# Allegro board s08-2.brd
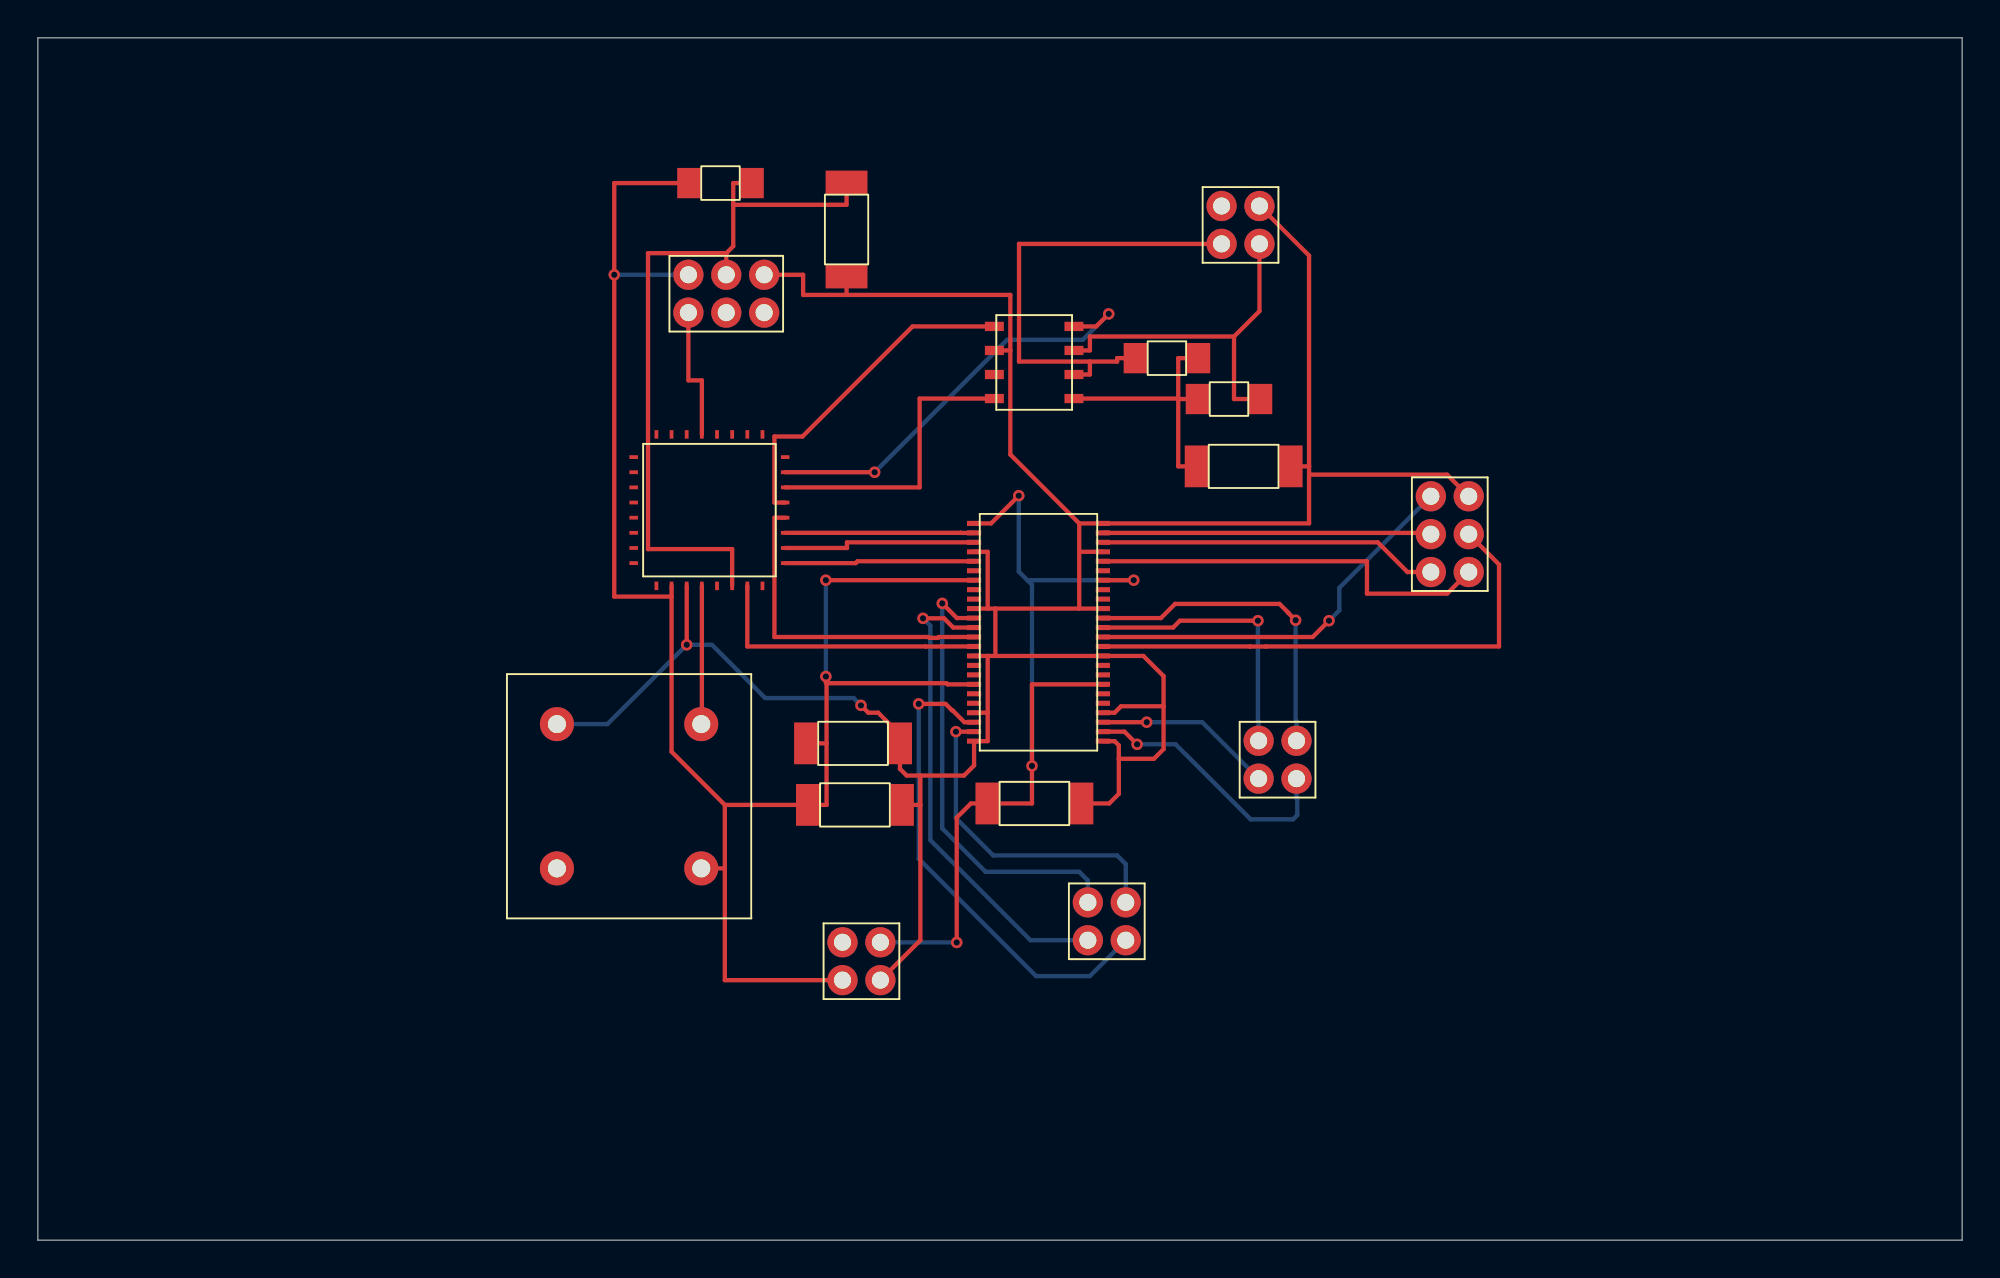
[diagram p0: board, top side]
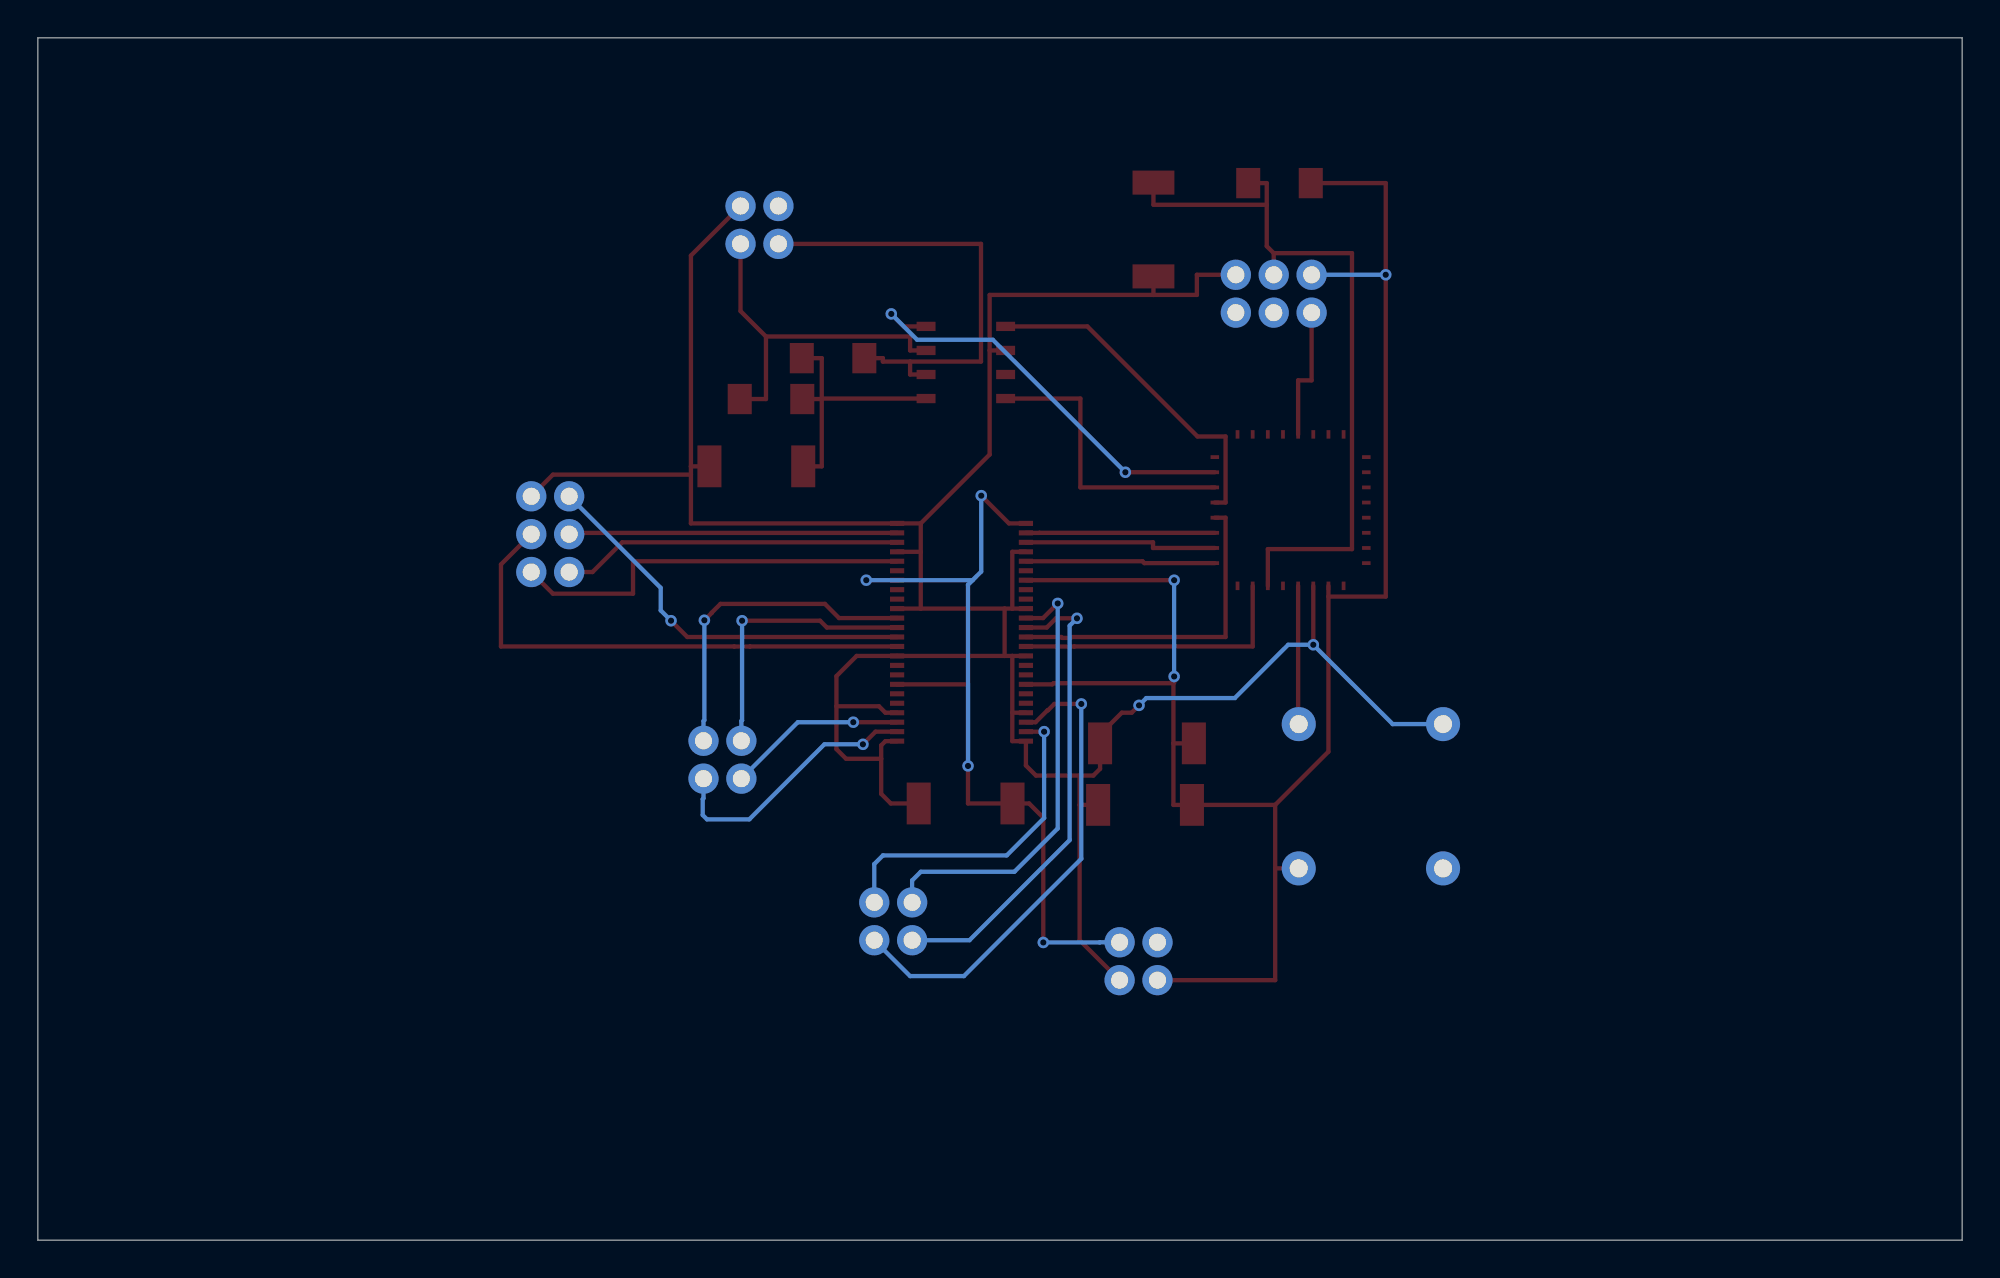
[diagram p1: board, bottom side, seen from below]

Outline 101.6 x 63.5 mm; copper layers: TOP, BOTTOM. Coordinates in mm from the lower left corner of the outline.
Outline path: 0,63.5 101.6,63.5 101.6,0 0,0 0,63.5

## Placement (name value [footprint] x y rotation side)
C9  0.1u  [SMDCAP]  43.1 26.24 0 top
C10  0.1u  [SMDCAP]  52.68 23.06 0 top
C11  0.1u  [SMDCAP]  63.6 40.87 180 top
C12  0.1u  [SMDCAP]  42.7 53.44 90 top
C13  10u  [SMDCAP]  43.21 22.99 0 top
J7  Background Header  [HEADER6]  36.35 49.99 90 top
J12  CON6  [HEADER6]  74.55 37.29 0 top
J14  CON4  [HEADER4]  43.48 14.73 270 top
J15  CON4  [HEADER4]  63.5 53.62 90 top
J16  CON4  [HEADER4]  65.46 25.37 270 top
J17  CON4  [HEADER4]  56.44 16.84 0 top
R3  60  [SMDRES]  62.89 44.42 0 top
R4  60  [SMDRES]  59.61 46.58 0 top
R5  10k  [SMDRES]  36.04 55.83 180 top
U1  MC9S08DZ60  [MC9S08_LQFP32]  35.46 38.56 90 top
U2  SN74LVC16T245  [SN74_DGG]  52.83 32.11 0 top
U3  TJA1040T  [TJA1040_SO8]  52.6 46.36 0 top
U4  -  [OSCILLATOR]  31.22 23.44 90 top

## Library data of the parts
C9 C10 C13 = C_elect_0: Tolerance: ***; User Part Number: ***
C11 = C
C12 = C: Tolerance: ***; User Part Number: ***
J7 = CONN MOD 6-6_J
J12 = CON6
J14-J17 = CON4
R3-R5 = R
U1 = MC9S08DZ60
U2 = SN74LVC16T245
U3 = TJA1040T
U4 = OSCILLATOR_0

## Footprints (pads in the part's own frame, mm; a bottom-side part is the same pattern mirrored in y, then rotated)
HEADER4
  round 1.6 hole 0.9: 1(-1,1) 2(-1,-1) 3(1,-1) 4(1,1)
HEADER6
  round 1.6 hole 0.9: 1(-1,2) 2(-1,0) 3(-1,-2) 4(1,-2) 5(1,0) 6(1,2)
MC9S08_LQFP32
  rect 0.45x0.2 smd: 1(-4,2.8) 2(-4,2) 3(-4,1.2) 4(-4,0.4) 5(-4,-0.4) 6(-4,-1.2) 7(-4,-2) 8(-4,-2.8) 17(4,-2.8) 18(4,-2) 19(4,-1.2) 20(4,-0.4) 21(4,0.4) 22(4,1.2) 23(4,2) 24(4,2.8)
  rect 0.2x0.45 smd: 9(-2.8,-4) 10(-2,-4) 11(-1.2,-4) 12(-0.4,-4) 13(0.4,-4) 14(1.2,-4) 15(2,-4) 16(2.8,-4) 25(2.8,4) 26(2,4) 27(1.2,4) 28(0.4,4) 29(-0.4,4) 30(-1.2,4) 31(-2,4) 32(-2.8,4)
OSCILLATOR
  round 1.8 hole 0.95 unplated: (-3.81,3.81) (-3.81,-3.81) (3.81,3.81) (3.81,-3.81)
SMDCAP
  rect 1.27x2.21 smd: 1(-2.54,0) 2(2.413,0)
SMDRES
  rect 1.27x1.6 smd: 1(-1.651,0) 2(1.651,0)
SN74_DGG
  rect 0.75x0.27 smd: 1(-3.4,5.75) 2(-3.4,5.25) 3(-3.4,4.75) 4(-3.4,4.25) 5(-3.4,3.75) 6(-3.4,3.25) 7(-3.4,2.75) 8(-3.4,2.25) 9(-3.4,1.75) 10(-3.4,1.25) 11(-3.4,0.75) 12(-3.4,0.25) 13(-3.4,-0.25) 14(-3.4,-0.75) 15(-3.4,-1.25) 16(-3.4,-1.75) 17(-3.4,-2.25) 18(-3.4,-2.75) 19(-3.4,-3.25) 20(-3.4,-3.75) 21(-3.4,-4.25) 22(-3.4,-4.75) 23(-3.4,-5.25) 24(-3.4,-5.75) 25(3.4,-5.75) 26(3.4,-5.25) 27(3.4,-4.75) 28(3.4,-4.25) 29(3.4,-3.75) 30(3.4,-3.25) 31(3.4,-2.75) 32(3.4,-2.25) 33(3.4,-1.75) 34(3.4,-1.25) 35(3.4,-0.75) 36(3.4,-0.25) 37(3.4,0.25) 38(3.4,0.75) 39(3.4,1.25) 40(3.4,1.75) 41(3.4,2.25) 42(3.4,2.75) 43(3.4,3.25) 44(3.4,3.75) 45(3.4,4.25) 46(3.4,4.75) 47(3.4,5.25) 48(3.4,5.75)
TJA1040_SO8
  rect 1x0.49 smd: 1(-2.1,1.905) 2(-2.1,0.635) 3(-2.1,-0.635) 4(-2.1,-1.905) 5(2.1,-1.905) 6(2.1,-0.635) 7(2.1,0.635) 8(2.1,1.905)

## Nets
GND: C9.2(-) C10.2(-) C11.1 C12.1 C13.2(-) J7.4(2) J12.6 J14.4 J15.3 U1.3(VSS) U2.4(GND#4) U2.10(GND#10) U2.15(GND#15) U2.21(GND#21) U2.24(2DIR) U2.25(2OEN) U2.28(GND#28) U2.34(GND#34) U2.39(GND#39) U2.45(GND#45) U2.48(1OEN) U3.2(GND)
VCC_1.8: C10.1(+) J14.1 U2.1(1DIR) U2.31(VCCA#31) U2.42(VCCA#42)
VCC_5.0: C9.1(+) C13.1(+) J7.6 J14.3 R5.2 U1.2(VDD) U2.7(VCCB#7) U2.18(VCCB#18)
VDD_S08: U3.3(VCC)
1A4: U2.43(1A4)
1A5: U2.41(1A5)
1A6: U2.40(1A6)
1A7: J16.1 U2.38(1A7)
1A8: J16.2 U2.37(1A8)
1B4: U2.6(1B4)
1B5: U2.8(1B5)
1B6: U2.9(1B6)
1B7: J17.1 U2.11(1B7)
1B8: J17.2 U2.12(1B8)
2A3: U2.33(2A3)
2A4: U2.32(2A4)
2A5: U2.30(2A5)
2A6: U2.29(2A6)
2A7: J16.3 U2.27(2A7)
2A8: J16.4 U2.26(2A8)
2B3: U2.16(2B3)
2B4: U2.17(2B4)
2B5: U2.19(2B5)
2B6: U2.20(2B6)
2B7: J17.3 U2.22(2B7)
2B8: J17.4 U2.23(2B8)
BKGD: J7.1 U1.21(BKGD/MS)
CANH: J15.2 R3.2 U3.7(CANH)
CANL: J15.1 R4.1 U3.6(CANL)
EXTAL: U1.4(PTG0/EXTAL)
RESET: C12.2 J7.5(4) R5.1 U1.6(RESETN)
RXCAN: U1.14(PTE7/RXD2/RXCAN) U3.4(RXD)
SPI_CLOCK_1.8V: J12.3 U2.46(1A2)
SPI_CLOCK_5V: U1.10(PTE3/SPSCK) U2.3(1B2)
SPI_CS_1.8V: J12.4 U2.44(1A3)
SPI_CS_5V: U1.9(PTE2/SSN) U2.5(1B3)
SPI_INTERRUPT_1.8V: J12.5 U2.35(2A2)
SPI_INTERRUPT_5V: U1.7(PTE0/TXD1) U2.14(2B2)
SPI_MISO_1.8V: J12.1 U2.36(2A1)
SPI_MISO_5V: U1.12(PTE5/SDA/MISO) U2.13(2B1)
SPI_MOSI_1.8V: J12.2 U2.47(1A1)
SPI_MOSI_5V: U1.11(PTE4/SCL/MOSI) U2.2(1B1)
STB: U1.15(PTD0/PID0/TPM2CH0) U3.8(STB)
TXCAN: U1.13(PTE6/TXD2/TXCAN) U3.1(TXD)
N57563: C11.2 R3.1 R4.2 U3.5(SPLIT)

Pads without a net: J7 2 3; J14 2; J15 4; U1 1 5 8 16 17 18 19 20 22 23 24 25 26 27 28 29 30 31 32

## Via types
v1: diameter 0.61, hole 0.33, TOP to BOTTOM, 20 vias

## Routing (per net, layer and track width the routed paths; a pad name or vN(x,y) marks a point on that pad's centre or on a via; arc(x,y) is an arc through that point)
GND: length 164.9
  TOP w0.229: J7.4 40.4,50.99 40.4,49.92 42.7,49.92 ; 67.12,40.87 67.12,40.43 ; 67.12,40.87 C11.1 ; 67.12,40.87 67.12,52 J15.3 ; 67.12,40.43 74.41,40.43 J12.6 ; 67.12,40.43 67.12,37.86 U2.48 54.98,37.86 ; U2.4 50.15,36.36 50.15,33.36 ; C10.2 56.57,23.06 57.07,23.57 57.07,25.43 ; U2.15 50.15,30.86 ; 50.15,30.86 50.56,30.86 ; 50.15,30.86 50.15,27.86 ; 50.56,30.86 U2.34 58.37,30.86 59.44,29.79 59.44,28.2 ; 50.56,30.86 50.56,33.36 ; J14.4 46.6,15.84 46.6,22.99 ; U2.39 54.98,33.36 ; 54.98,33.36 50.56,33.36 ; 54.98,33.36 54.98,36.36 ; U2.25 56.85,26.36 57.07,26.13 57.07,25.43 ; 50.56,33.36 50.15,33.36 ; 59.44,28.2 57.19,28.2 56.85,27.86 U2.28 ; 59.44,28.2 59.44,25.93 58.93,25.43 57.07,25.43 ; 46.6,24.54 45.87,24.54 45.52,24.89 C9.2 45.52,26.71 44.37,27.86 43.85,27.86 v1(43.46,28.24) ; 46.6,24.54 48.9,24.54 49.43,25.07 U2.24 50.15,26.36 50.15,27.86 ; 46.6,24.54 46.6,22.99 ; U2.45 54.98,36.36 ; 54.98,36.36 54.98,37.86 ; 51.35,46.99 51.35,41.49 54.98,37.86 ; 51.35,46.99 U3.2 ; 51.35,46.99 51.35,49.92 42.7,49.92 ; 50.15,33.36 U2.10 ; C12.1 42.7,49.92 ; U1.3 v1(34.26,31.45) ; U2.21 50.15,27.86 ; 46.6,22.99 C13.2
  BOTTOM w0.229: v1(43.46,28.24) 43.07,28.63 38.4,28.63 35.59,31.45 v1(34.26,31.45) 30.07,27.25 27.41,27.25
VCC_1.8: length 49.7
  TOP w0.229: v1(51.79,39.32) 50.33,37.86 U2.1 ; U2.42 v1(57.86,34.86) ; U2.31 52.49,29.36 v1(52.49,25.04) 52.49,23.06 C10.1 49.26,23.06 48.51,22.31 v1(48.51,15.72)
  BOTTOM w0.229: 52.25,34.86 v1(57.86,34.86) ; 52.25,34.86 51.79,35.31 v1(51.79,39.32) ; 52.25,34.86 52.49,34.61 v1(52.49,25.04) ; J14.1 45.53,15.73 45.54,15.72 v1(48.51,15.72)
VCC_5.0: length 96.2
  TOP w0.229: 41.64,29.41 41.64,26.24 ; 41.64,29.41 47.98,29.41 48.03,29.36 U2.18 ; 41.64,29.41 41.61,29.45 v1(41.61,29.77) ; 41.64,26.24 41.64,22.99 C13.1 36.27,22.99 ; 41.64,26.24 C9.1 ; 36.27,22.99 33.46,25.8 33.46,33.99 ; 36.27,22.99 36.27,19.63 ; J14.3 36.27,13.73 36.27,19.63 ; 35.03,19.63 36.27,19.63 ; U1.2 33.46,33.99 ; 33.46,33.99 30.43,33.99 v1(30.43,50.99) 30.43,55.83 R5.2 ; U2.7 v1(41.61,34.86)
  BOTTOM w0.229: J7.6 v1(30.43,50.99) ; v1(41.61,34.86) v1(41.61,29.77)
1A7: length 17.2
  TOP w0.229: v1(66.41,32.74) 66.02,33.13 66.02,33.14 65.56,33.6 60.05,33.6 59.3,32.86 U2.38
  BOTTOM w0.229: v1(66.41,32.74) 66.41,27.46 66.46,27.42 J16.1
1A8: length 14.7
  TOP w0.229: U2.37 59.94,32.36 60.3,32.72 v1(64.42,32.72)
  BOTTOM w0.229: J16.2 64.46,27.42 64.42,27.45 v1(64.42,32.72)
1B7: length 23.9
  TOP w0.229: U2.11 48.53,32.86 v1(47.75,33.63)
  BOTTOM w0.229: J17.1 55.44,19 54.98,19.46 50.04,19.46 47.75,21.74 v1(47.75,33.63)
1B8: length 25.3
  TOP w0.229: U2.12 48.33,32.36 47.84,32.84 v1(46.74,32.84)
  BOTTOM w0.229: v1(46.74,32.84) 47.12,32.46 47.12,21.13 52.41,15.84 J17.2
2A7: length 9.5
  TOP w0.229: U2.27 v1(58.55,27.36)
  BOTTOM w0.229: v1(58.55,27.36) 61.47,27.36 J16.3
2A8: length 14.2
  TOP w0.229: v1(58.04,26.19) 57.37,26.86 U2.26
  BOTTOM w0.229: J16.4 66.46,23.33 66.5,23.29 66.5,22.45 66.27,22.23 64.03,22.23 60.07,26.19 v1(58.04,26.19)
2B7: length 25.8
  TOP w0.229: U2.22 48.92,27.36 48.29,27.99 48.27,27.99 47.93,28.32 v1(46.51,28.32)
  BOTTOM w0.229: J17.3 55.54,13.94 52.7,13.94 46.51,20.14 v1(46.51,28.32)
2B8: length 17.5
  TOP w0.229: U2.23 v1(48.47,26.86)
  BOTTOM w0.229: v1(48.47,26.86) 48.47,22.29 50.44,20.32 56.98,20.32 57.44,19.86 J17.4
BKGD: length 7.1
  TOP w0.229: J7.1 34.35,45.41 35.06,45.41 U1.21
CANH: length 19.3
  TOP w0.229: R3.2 63.16,44.42 63.16,47.73 ; 63.16,47.73 64.5,49.07 J15.2 ; 63.16,47.73 55.55,47.73 55.55,46.99 U3.7
CANL: length 24.8
  TOP w0.229: R4.1 56.98,46.58 56.98,46.4 55.55,46.4 ; J15.1 51.8,52.62 51.8,46.4 55.55,46.4 ; 55.55,46.4 55.55,45.72 U3.6
EXTAL: length 7.3
  TOP w0.229: 35.03,27.25 35.06,27.29 U1.4
RESET: length 39.3
  TOP w0.229: U1.6 36.66,36.5 32.22,36.5 32.22,52.13 36.35,52.13 ; R5.1 36.72,55.83 36.72,54.69 ; J7.5 36.35,52.13 ; 36.35,52.13 36.72,52.5 36.72,54.69 ; 36.72,54.69 42.7,54.69 C12.2
RXCAN: length 15.7
  TOP w0.229: U3.4 46.56,44.45 46.56,39.76 U1.14
SPI_CLOCK_1.8V: length 18
  TOP w0.229: U2.46 70.75,36.86 72.32,35.29 J12.3
SPI_CLOCK_5V: length 10.3
  TOP w0.229: U2.3 42.72,36.86 42.72,36.56 U1.10
SPI_CS_1.8V: length 21.5
  TOP w0.229: J12.4 74.41,34.14 70.18,34.14 70.18,35.86 U2.44
SPI_CS_5V: length 10
  TOP w0.229: U2.5 43.28,35.86 43.18,35.76 U1.9
SPI_INTERRUPT_1.8V: length 27.5
  TOP w0.229: U2.35 64,31.36 64,31.35 64.83,31.35 64.84,31.36 77.15,31.36 77.15,35.69 J12.5
SPI_INTERRUPT_5V: length 15.2
  TOP w0.229: U2.14 47.72,31.36 47.71,31.35 46.88,31.35 46.88,31.36 37.46,31.36 U1.7
SPI_MISO_1.8V: length 21.1
  TOP w0.229: U2.36 67.31,31.86 v1(68.17,32.72)
  BOTTOM w0.229: v1(68.17,32.72) 68.72,33.26 68.72,34.45 J12.1
SPI_MISO_5V: length 17.4
  TOP w0.229: U2.13 47.57,31.86 47.53,31.81 47.07,31.81 47.03,31.86 38.89,31.86 38.89,38.16 U1.12
SPI_MOSI_1.8V: length 17.3
  TOP w0.229: U2.47 73.48,37.36 J12.2
SPI_MOSI_5V: length 10
  TOP w0.229: U1.11 48.71,37.36 48.71,37.36 U2.2
STB: length 22.7
  TOP w0.229: U1.15 v1(44.18,40.56) ; v1(56.54,48.92) 55.88,48.26 U3.8
  BOTTOM w0.229: v1(56.54,48.92) 55.17,47.55 51.18,47.55 v1(44.18,40.56)
TXCAN: length 18.1
  TOP w0.229: U3.1 46.19,48.26 40.37,42.45 38.89,42.45 38.89,38.96 U1.13
N57563: length 14.3
  TOP w0.229: 60.21,44.42 R3.1 ; 60.21,44.42 60.21,44.45 ; 60.21,44.42 60.21,40.87 C11.2 ; R4.2 60.21,46.58 60.21,44.45 ; U3.5 60.21,44.45
